# Altium PCB 电机驱动L298N带光耦.PcbDoc (part 1 of 2)
Units mm, origin at the board's own origin, x right, y up, seen from the top; angles counter-clockwise.
Board outline 152.4 x 101.6 mm, 2 copper layers (Top Layer, Bottom Layer); 36 components, 29 nets, 101 pads, 0 vias.
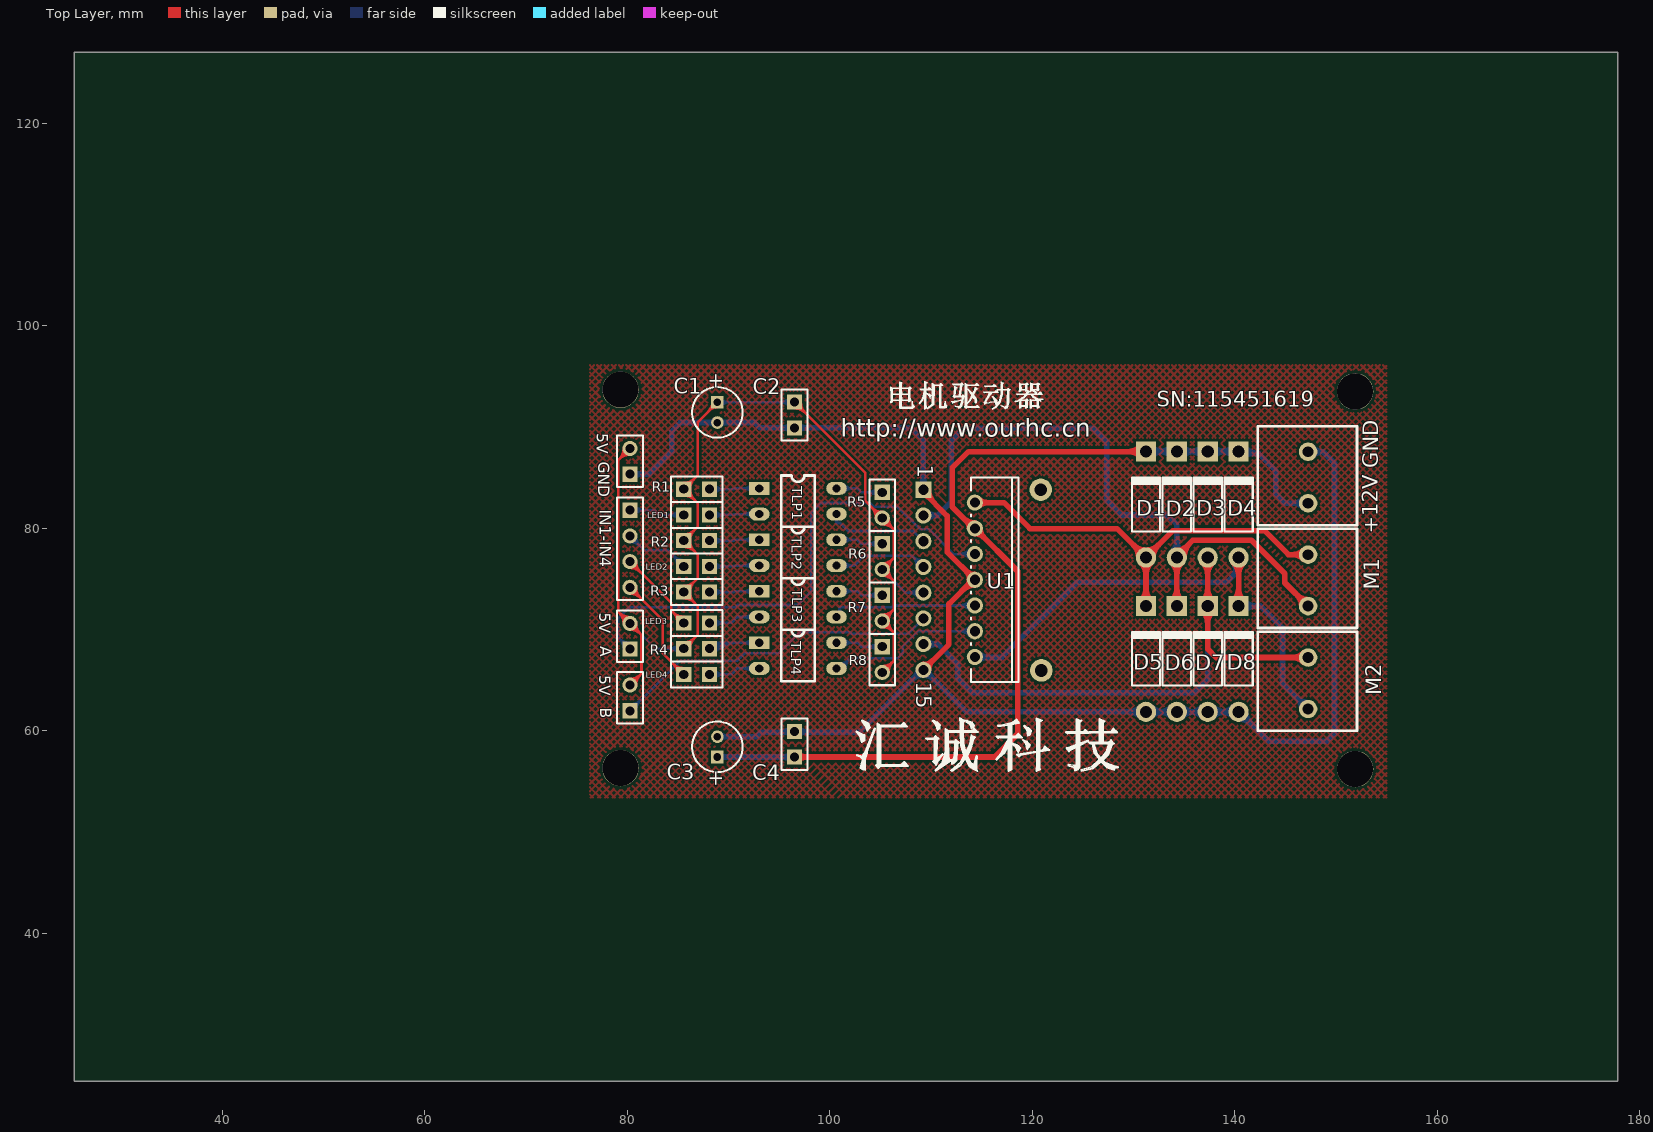
[diagram p0: Top Layer view]
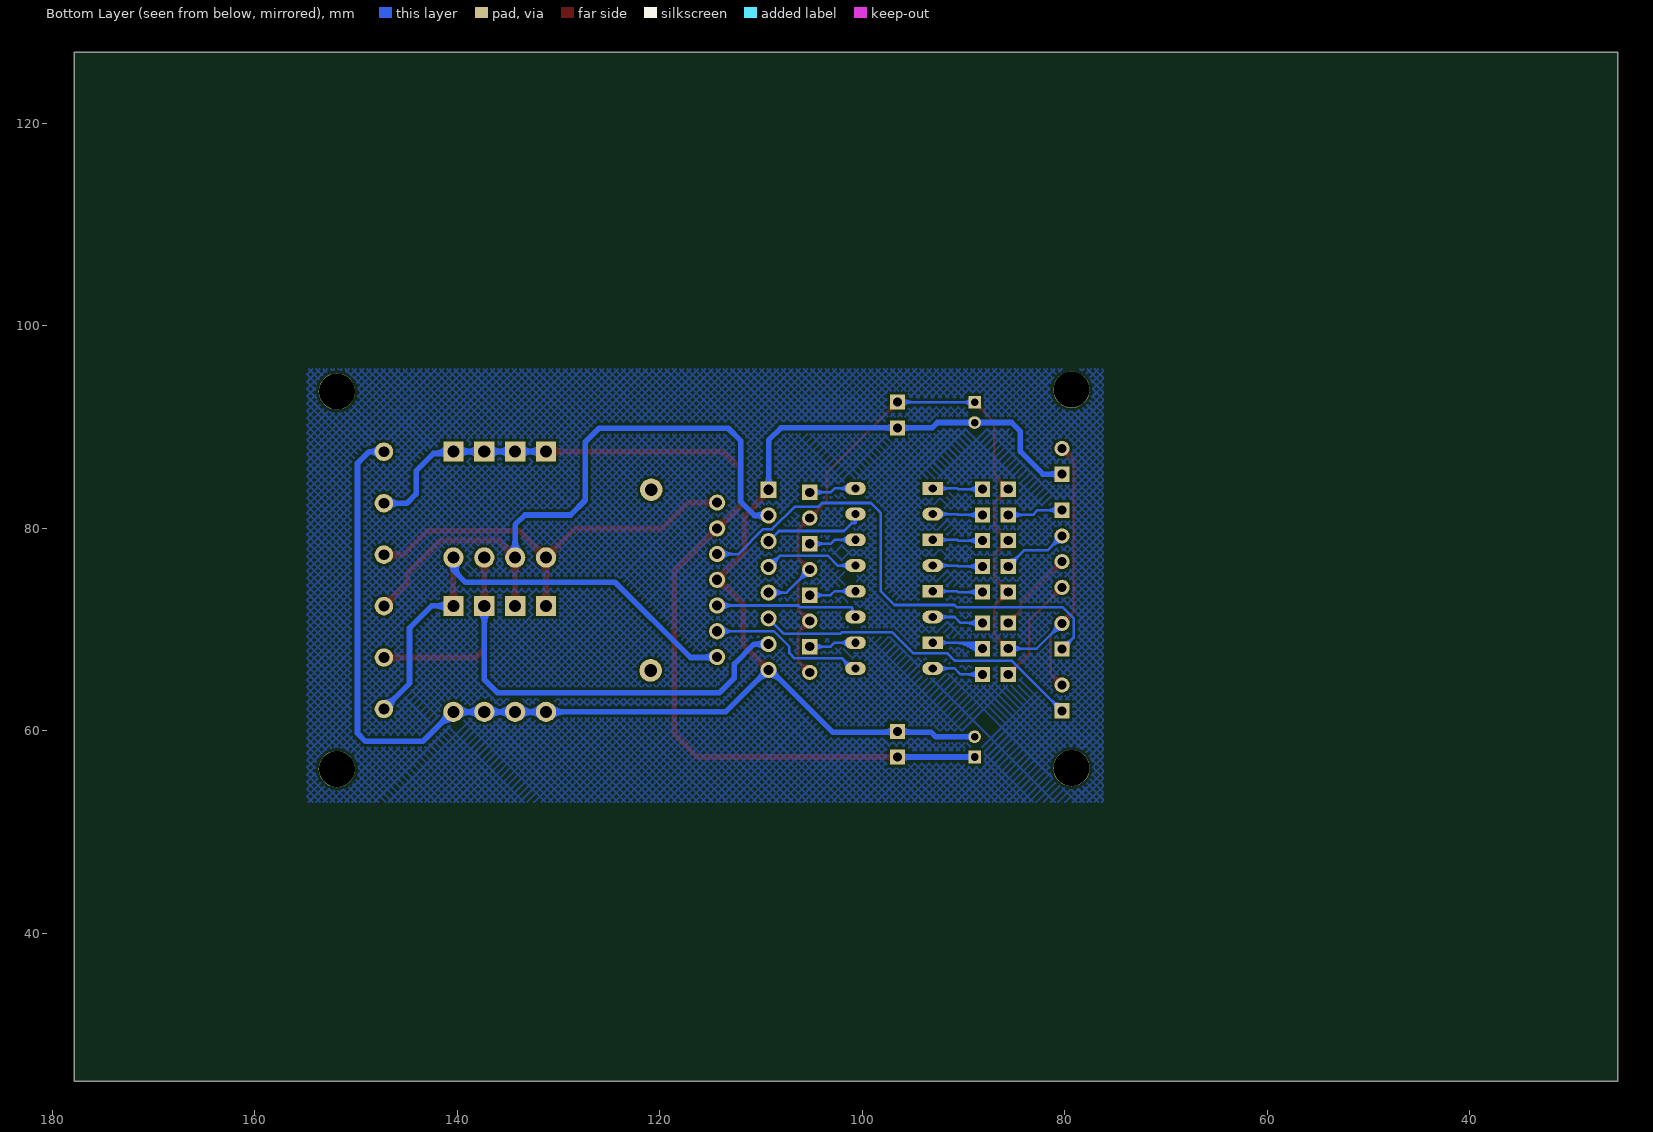
[diagram p1: Bottom Layer view, seen from below]

## Layer stack, top to bottom
Top Layer: signal copper 0.0356
Dielectric: dielectric 0.32, FR-4, Dk 4.8
Bottom Layer: signal copper 0.0356

## Board outline
25.4,25.4 177.8,25.4 177.8,127 25.4,127

## Design rules (kind name [scope] priority, off if disabled: settings)
Clearance [All] p1: gap=0.254
ComponentClearance [All] p1: gap=0.254 collisioncheckmode=3 verticalgap=0.254
PolygonConnect [All] p1: connectstyle=Relief reliefconductorwidth=0.254 reliefentries=4 polygonreliefangle="90 Angle"
RoutingVias [All] p1: holewidth=0.711 width=1.27 viastyle="Through Hole" minholewidth=0.711 minwidth=1.27 maxholewidth=0.711 maxwidth=1.27
SolderMaskExpansion [All] p1: expansion=0.102
TestPointUsage [All] p1: valid=0 allowmultiple=FALSE
Testpoint [All] p1: side=15 testpointundercomponent=TRUE minsize=1.016 maxsize=2.54 preferedsize=1.524 minholesize=0 maxholesize=1.016 preferedholesize=0.813 testpointgrid=0.025 style=1023 order=0-112345678
Width Width_6 [InNet('NetD4_1')] p1: maxlimit=0.554 minlimit=0.554 preferedwidth=0.554
Width Width_5 [InNet('NetD3_1')] p2: maxlimit=0.554 minlimit=0.554 preferedwidth=0.554
Width Width_4 [InNet('NetD2_1')] p3: maxlimit=0.554 minlimit=0.554 preferedwidth=0.554
Width Width_3 [InNet('NetD1_1')] p4: maxlimit=0.554 minlimit=0.554 preferedwidth=0.554
Width Width_2 [InNet('+12V')] p5: maxlimit=0.554 minlimit=0.554 preferedwidth=0.554
Width Width_1 [InNet('GND')] p6: maxlimit=0.554 minlimit=0.554 preferedwidth=0.554
Width [All] p7: maxlimit=0.254 minlimit=0.254 preferedwidth=0.254
17 further rules are at their usual default settings.

## Components (designator, comment, footprint, x,y, rotation, side; value= is the part's Value field where it differs from the comment)
5V "" HDR1X2#1 80.264,61.976 r90 top (schematic designator +5V)
5V "" HDR1X2#1 80.264,85.344 r90 top (schematic designator "Power 5V")
+12V "" PCBComponent_1 146.595,82.983 r270 top (schematic designator "Power 12V")
A "" HDR1X2#1 80.264,68.072 r90 top (schematic designator PWM)
C1 "" CAPPR2-5x6.8 88.9,91.44 r270 top
C2 "104" HDR1X2#2 96.52,89.916 r90 top
C3 "" CAPPR2-5x6.8 88.9,58.42 r90 top
C4 "104" HDR1X2#2 96.52,59.944 r270 top
D1 "1N4007" DIO10.46-5.3x2.8 131.219,82.343 r90 top
D2 "1N4007" DIO10.46-5.3x2.8 134.267,82.343 r90 top
D3 "1N4007" DIO10.46-5.3x2.8 137.315,82.343 r90 top
D4 "1N4007" DIO10.46-5.3x2.8 140.363,82.343 r90 top
D5 "1N4007" DIO10.46-5.3x2.8 131.219,67.103 r90 top
D6 "1N4007" DIO10.46-5.3x2.8 134.267,67.103 r90 top
D7 "1N4007" DIO10.46-5.3x2.8 137.315,67.103 r90 top
D8 "1N4007" DIO10.46-5.3x2.8 140.363,67.103 r90 top
IN1-IN4 "" HDR1X4 80.264,81.788 r270 top
LED1 "" HDR1X2#2 88.123,81.32 r180 top
LED2 "" HDR1X2#2 88.123,76.24 r180 top
LED3 "" HDR1X2#2 88.123,70.652 r180 top
LED4 "" HDR1X2#2 88.123,65.572 r180 top
M1 "" PCBComponent_1 146.595,72.823 r270 top
M2 "" PCBComponent_1 146.595,62.663 r270 top
R1 "" HDR1X2#2 85.583,83.86 r0 top
R2 "" HDR1X2#2 85.583,78.78 r0 top
R3 "" HDR1X2#2 85.583,73.7 r0 top
R4 "" HDR1X2#2 85.583,68.112 r0 top
R5 "" HDR1X2#1 105.177,83.55 r270 top
R6 "" HDR1X2#1 105.177,78.47 r270 top
R7 "" HDR1X2#1 105.177,73.39 r270 top
R8 "" HDR1X2#1 105.177,68.31 r270 top
TLP1 "" DIP4 93.041,83.941 r0 top (schematic designator TLP521-1)
TLP2 "" DIP4 93.041,78.861 r0 top (schematic designator TLP521-2)
TLP3 "" DIP4 93.041,73.781 r0 top (schematic designator TLP521-3)
TLP4 "" DIP4 93.041,68.701 r0 top (schematic designator TLP521-4)
U1 "L298N" DFM-T15/X1.6V 111.781,74.914 r270 top

## Footprints (in the part's own frame and the unit in brackets; to place one, negate y for a bottom-side part, rotate by r counter-clockwise, add the part's x,y. Pads: shape width x height; smd on the part's side, far side on the other; paste and mask are expansions set on the pad)
CAPPR2-5x6.8 [mm] "Capacitor, Electrolytic, Radial; Body 5 x 6.8 mm (Dia.xH typ); Pin Spacing 2 mm (typ)"
  rect 1.25x1.25 hole 0.75: 1(-1,0)
  round 1.25 hole 0.75: 2(1,0)
  silkscreen extent -2.5,-2.5 2.5,2.5
DFM-T15/X1.6V [mm]
  rect 1.6x1.6 hole 1: 1(-8.89,-2.54)
  round 1.6 hole 1: 2(-7.62,2.54) 3(-6.35,-2.54) 4(-5.08,2.54) 5(-3.81,-2.54) 6(-2.54,2.54) 7(-1.27,-2.54) 8(0,2.54) 9(1.27,-2.54) 10(2.54,2.54) 11(3.81,-2.54) 12(5.08,2.54) 13(6.35,-2.54) 14(7.62,2.54) 15(8.89,-2.54)
  silkscreen extent -10.1,2.14 10.1,6.84
DIO10.46-5.3x2.8 [mm] "Diode, Axial; Body 5.2 x 2.7 mm (LxDia. max), Lead Dia. 0.86 mm (max)"
  round 2 hole 1.2: 1(-5.23,0)
  rect 2x2 hole 1.2: 2(5.23,0)
  silkscreen extent -2.65,-1.4 2.75,1.4
DIP4 [mil]
  rect 80x50 hole 32: 1(0,0)
  oval 80x50 hole 32: 2(0,-100) 3(300,-100) 4(300,0)
  silkscreen extent 85,-150 215,50
HDR1X2#1 [mm] "Connector; Header; 2 Position"
  rect 1.5x1.5 hole 0.9: 1(0,0)
  round 1.5 hole 0.9: 2(2.54,0)
  silkscreen extent -1.27,-1.27 3.81,1.27
HDR1X2#2 [mm] "Connector; Header; 2 Position"
  rect 1.5x1.5 hole 0.9: 1(0,0) 2(2.54,0)
  silkscreen extent -1.27,-1.27 3.81,1.27
HDR1X4 [mm] "Connector; Header; 4 Position"
  rect 1.5x1.5 hole 0.9: 1(0,0)
  round 1.5 hole 0.9: 2(2.54,0) 3(5.08,0) 4(7.62,0)
  silkscreen extent -1.27,-1.27 8.89,1.27
PCBComponent_1 [mil]
  round 71.81 hole 41.81: 1(-180,25) 2(20,25)
  silkscreen extent -280,-170 105,215

## Part data
5V 5V +12V A M1 M2: library part MHDR1X2, "Header, 2-Pin"
C1 C3: library part "Cap Pol3", "Polarized Capacitor (Surface Mount)"
C2 C4: library part Cap, "Capacitor"
D1 D2 D3 D4 D5 D6 D7 D8: library part "Diode 1N4007", "1 Amp General Purpose Rectifier"
IN1-IN4: library part MHDR1X4, "Header, 4-Pin"
LED1 LED2 LED3 LED4: library part LED3, "Typical BLUE SiC LED"
R1 R2 R3 R4 R5 R6 R7 R8: library part Res2, "Resistor"
TLP1 TLP2 TLP3 TLP4: library part TLP521-1
U1: "Dual Full Bridge Driver"

## Free pads (board coordinates)
  round 2.224 hole 1.262: 0(120.83,83.809) 0(120.89,65.97)
  round 3.6 hole 3.562: ""(79.336,56.316) ""(79.336,93.685) ""(151.872,56.228) ""(151.872,93.509)

## Nets (pads, with @x,y where several pads share a name; then routed paths per layer and width w, separated by ;. In a path a pad name is that pad's centre, name@x,y a point inside that pad or via, vN(x,y) a via of type N, cw(c..) or ccw(c..) an arc to the next point about the centre after c; other vN are vias at no path point)
+5V: 5V.2 A.2 C1.1 C2.2 R1.1 R2.1 R3.1 R4.1 R5.2 R6.2 R7.2 R8.2 U1.9 | length 484.2
  Top Layer w0.254: 5V.2@80.264,64.516 81.407,65.659 81.407,69.469 A.2@80.264,70.612 79.121,71.755 79.121,86.741 5V.2@80.264,87.884 ; R4.1@85.583,68.112 86.944,69.473 86.944,72.338 R3.1@85.583,73.7 86.944,75.061 86.944,77.418 R2.1@85.583,78.78 86.944,80.141 86.944,82.498 R1.1@85.583,83.86 86.97,85.247 86.97,90.51 C1.1@88.9,92.44 ; C2.2@96.52,92.456 103.505,85.471 103.505,82.681 R5.2@105.177,81.01 106.324,79.862 106.324,77.077 R6.2@105.177,75.93 106.324,74.782 106.324,71.997 R7.2@105.177,70.85 106.324,69.702 106.324,66.917 R8.2@105.177,65.77 ; 79.2,71.676 cw(c78.137,70.612) A.2@79.641,70.612 ; 79.2,71.676 ccw(c80.264,72.739) A.2@80.264,71.235 ; 79.2,71.676 cw(c78.137,70.612) A.2@79.641,70.612 ; 79.2,71.676 ccw(c80.264,72.739) A.2@80.264,71.235 ; 79.2,71.676 cw(c78.137,70.612) A.2@79.641,70.612 ; 79.2,71.676 ccw(c80.264,72.739) A.2@80.264,71.235 ; 79.2,71.676 cw(c78.137,70.612) A.2@79.641,70.612 ; 79.2,71.676 ccw(c80.264,72.739) A.2@80.264,71.235 ; 79.2,86.82 cw(c80.264,85.757) 5V.2@80.264,87.261 ; 79.2,86.82 ccw(c78.137,87.884) 5V.2@79.641,87.884 ; 79.2,86.82 cw(c80.264,85.757) 5V.2@80.264,87.261 ; 79.2,86.82 ccw(c78.137,87.884) 5V.2@79.641,87.884 ; 79.2,86.82 ccw(c78.137,87.884) 5V.2@79.641,87.884 ; 79.2,86.82 cw(c80.264,85.757) 5V.2@80.264,87.261 ; 79.2,86.82 cw(c80.264,85.757) 5V.2@80.264,87.261 ; 79.2,86.82 ccw(c78.137,87.884) 5V.2@79.641,87.884 ; 79.634,71.242 cw(c79.004,70.612) A.2@79.895,70.612 ; 79.634,71.242 ccw(c80.264,71.872) A.2@80.264,70.981 ; 79.634,71.242 cw(c79.004,70.612) A.2@79.895,70.612 ; 79.634,71.242 ccw(c80.264,71.872) A.2@80.264,70.981 ; 79.634,71.242 cw(c79.004,70.612) A.2@79.895,70.612 ; 79.634,71.242 ccw(c80.264,71.872) A.2@80.264,70.981 ; 79.634,71.242 cw(c79.004,70.612) A.2@79.895,70.612 ; 79.634,71.242 ccw(c80.264,71.872) A.2@80.264,70.981 ; 79.634,87.254 cw(c80.264,86.624) 5V.2@80.264,87.515 ; 79.634,87.254 ccw(c79.004,87.884) 5V.2@79.895,87.884 ; 79.634,87.254 cw(c80.264,86.624) 5V.2@80.264,87.515 ; 79.634,87.254 ccw(c79.004,87.884) 5V.2@79.895,87.884 ; 79.634,87.254 cw(c80.264,86.624) 5V.2@80.264,87.515 ; 79.634,87.254 ccw(c79.004,87.884) 5V.2@79.895,87.884 ; 79.634,87.254 cw(c80.264,86.624) 5V.2@80.264,87.515 ; 79.634,87.254 ccw(c79.004,87.884) 5V.2@79.895,87.884 ; 5V.2@80.264,64.885 ccw(c80.264,65.776) 80.894,65.146 ; 5V.2@80.264,64.885 ccw(c80.264,65.776) 80.894,65.146 ; 5V.2@80.264,64.885 ccw(c80.264,65.776) 80.894,65.146 ; 5V.2@80.264,64.885 ccw(c80.264,65.776) 80.894,65.146 ; 5V.2@80.264,65.139 ccw(c80.264,66.643) 81.328,65.58 ; 5V.2@80.264,65.139 ccw(c80.264,66.643) 81.328,65.58 ; 5V.2@80.264,65.139 ccw(c80.264,66.643) 81.328,65.58 ; 5V.2@80.264,65.139 ccw(c80.264,66.643) 81.328,65.58 ; A.2@80.264,69.989 cw(c80.264,68.485) 81.328,69.548 ; A.2@80.264,69.989 cw(c80.264,68.485) 81.328,69.548 ; A.2@80.264,69.989 cw(c80.264,68.485) 81.328,69.548 ; A.2@80.264,69.989 cw(c80.264,68.485) 81.328,69.548 ; A.2@80.264,70.243 cw(c80.264,69.352) 80.894,69.982 ; A.2@80.264,70.243 cw(c80.264,69.352) 80.894,69.982 ; A.2@80.264,70.243 cw(c80.264,69.352) 80.894,69.982 ; A.2@80.264,70.243 cw(c80.264,69.352) 80.894,69.982 ; 5V.2@80.633,64.516 cw(c81.524,64.516) 80.894,65.146 ; 5V.2@80.633,64.516 cw(c81.524,64.516) 80.894,65.146 ; 5V.2@80.633,64.516 cw(c81.524,64.516) 80.894,65.146 ; 5V.2@80.633,64.516 cw(c81.524,64.516) 80.894,65.146 ; A.2@80.633,70.612 ccw(c81.524,70.612) 80.894,69.982 ; A.2@80.633,70.612 ccw(c81.524,70.612) 80.894,69.982 ; A.2@80.633,70.612 ccw(c81.524,70.612) 80.894,69.982 ; A.2@80.633,70.612 ccw(c81.524,70.612) 80.894,69.982 ; 5V.2@80.887,64.516 cw(c82.391,64.516) 81.328,65.58 ; 5V.2@80.887,64.516 cw(c82.391,64.516) 81.328,65.58 ; 5V.2@80.887,64.516 cw(c82.391,64.516) 81.328,65.58 ; 5V.2@80.887,64.516 cw(c82.391,64.516) 81.328,65.58 ; A.2@80.887,70.612 ccw(c82.391,70.612) 81.328,69.548 ; A.2@80.887,70.612 ccw(c82.391,70.612) 81.328,69.548 ; A.2@80.887,70.612 ccw(c82.391,70.612) 81.328,69.548 ; A.2@80.887,70.612 ccw(c82.391,70.612) 81.328,69.548 ; R4.1@85.583,68.481 ccw(c85.583,69.372) R4.1@86.213,68.742 ; R4.1@85.583,68.481 ccw(c85.583,69.372) R4.1@86.213,68.742 ; R4.1@85.583,68.481 ccw(c85.583,69.372) R4.1@86.213,68.742 ; R4.1@85.583,68.481 ccw(c85.583,69.372) R4.1@86.213,68.742 ; R4.1@85.583,68.735 ccw(c85.583,70.239) 86.646,69.175 ; R4.1@85.583,68.735 ccw(c85.583,70.239) 86.646,69.175 ; R4.1@85.583,68.735 ccw(c85.583,70.239) 86.646,69.175 ; R4.1@85.583,68.735 ccw(c85.583,70.239) 86.646,69.175 ; R3.1@85.583,73.077 cw(c85.583,71.573) 86.646,72.636 ; R3.1@85.583,73.077 cw(c85.583,71.573) 86.646,72.636 ; R3.1@85.583,73.077 cw(c85.583,71.573) 86.646,72.636 ; R3.1@85.583,73.077 cw(c85.583,71.573) 86.646,72.636 ; R3.1@85.583,73.331 cw(c85.583,72.44) R3.1@86.213,73.07 ; R3.1@85.583,73.331 cw(c85.583,72.44) R3.1@86.213,73.07 ; R3.1@85.583,73.331 cw(c85.583,72.44) R3.1@86.213,73.07 ; R3.1@85.583,73.331 cw(c85.583,72.44) R3.1@86.213,73.07 ; R3.1@85.583,74.069 ccw(c85.583,74.96) R3.1@86.213,74.33 ; R3.1@85.583,74.069 ccw(c85.583,74.96) R3.1@86.213,74.33 ; R3.1@85.583,74.069 ccw(c85.583,74.96) R3.1@86.213,74.33 ; R3.1@85.583,74.069 ccw(c85.583,74.96) R3.1@86.213,74.33 ; R3.1@85.583,74.323 ccw(c85.583,75.827) 86.646,74.763 ; R3.1@85.583,74.323 ccw(c85.583,75.827) 86.646,74.763 ; R3.1@85.583,74.323 ccw(c85.583,75.827) 86.646,74.763 ; R3.1@85.583,74.323 ccw(c85.583,75.827) 86.646,74.763 ; R2.1@85.583,78.157 cw(c85.583,76.653) 86.646,77.716 ; R2.1@85.583,78.157 cw(c85.583,76.653) 86.646,77.716 ; R2.1@85.583,78.157 cw(c85.583,76.653) 86.646,77.716 ; R2.1@85.583,78.157 cw(c85.583,76.653) 86.646,77.716 ; R2.1@85.583,78.411 cw(c85.583,77.52) R2.1@86.213,78.15 ; R2.1@85.583,78.411 cw(c85.583,77.52) R2.1@86.213,78.15 ; R2.1@85.583,78.411 cw(c85.583,77.52) R2.1@86.213,78.15 ; R2.1@85.583,78.411 cw(c85.583,77.52) R2.1@86.213,78.15 ; R2.1@85.583,79.149 ccw(c85.583,80.04) R2.1@86.213,79.41 ; R2.1@85.583,79.149 ccw(c85.583,80.04) R2.1@86.213,79.41 ; R2.1@85.583,79.149 ccw(c85.583,80.04) R2.1@86.213,79.41 ; R2.1@85.583,79.149 ccw(c85.583,80.04) R2.1@86.213,79.41 ; R2.1@85.583,79.403 ccw(c85.583,80.907) 86.646,79.843 ; R2.1@85.583,79.403 ccw(c85.583,80.907) 86.646,79.843 ; R2.1@85.583,79.403 ccw(c85.583,80.907) 86.646,79.843 ; R2.1@85.583,79.403 ccw(c85.583,80.907) 86.646,79.843 ; R1.1@85.583,83.237 cw(c85.583,81.733) 86.646,82.796 ; R1.1@85.583,83.237 cw(c85.583,81.733) 86.646,82.796 ; R1.1@85.583,83.237 cw(c85.583,81.733) 86.646,82.796 ; R1.1@85.583,83.237 cw(c85.583,81.733) 86.646,82.796 ; R1.1@85.583,83.491 cw(c85.583,82.6) R1.1@86.213,83.23 ; R1.1@85.583,83.491 cw(c85.583,82.6) R1.1@86.213,83.23 ; R1.1@85.583,83.491 cw(c85.583,82.6) R1.1@86.213,83.23 ; R1.1@85.583,83.491 cw(c85.583,82.6) R1.1@86.213,83.23 ; R1.1@85.583,84.229 ccw(c85.583,85.12) R1.1@86.213,84.49 ; R1.1@85.583,84.229 ccw(c85.583,85.12) R1.1@86.213,84.49 ; R1.1@85.583,84.229 ccw(c85.583,85.12) R1.1@86.213,84.49 ; R1.1@85.583,84.229 ccw(c85.583,85.12) R1.1@86.213,84.49 ; R1.1@85.583,84.483 ccw(c85.583,85.987) 86.646,84.923 ; R1.1@85.583,84.483 ccw(c85.583,85.987) 86.646,84.923 ; R1.1@85.583,84.483 ccw(c85.583,85.987) 86.646,84.923 ; R1.1@85.583,84.483 ccw(c85.583,85.987) 86.646,84.923 ; R4.1@85.952,68.112 cw(c86.842,68.112) R4.1@86.213,68.742 ; R4.1@85.952,68.112 cw(c86.842,68.112) R4.1@86.213,68.742 ; R4.1@85.952,68.112 cw(c86.842,68.112) R4.1@86.213,68.742 ; R4.1@85.952,68.112 cw(c86.842,68.112) R4.1@86.213,68.742 ; R3.1@85.952,73.7 cw(c86.842,73.7) R3.1@86.213,74.33 ; R3.1@85.952,73.7 ccw(c86.842,73.7) R3.1@86.213,73.07 ; R3.1@85.952,73.7 cw(c86.842,73.7) R3.1@86.213,74.33 ; R3.1@85.952,73.7 ccw(c86.842,73.7) R3.1@86.213,73.07 ; R3.1@85.952,73.7 ccw(c86.842,73.7) R3.1@86.213,73.07 ; R3.1@85.952,73.7 cw(c86.842,73.7) R3.1@86.213,74.33 ; R3.1@85.952,73.7 cw(c86.842,73.7) R3.1@86.213,74.33 ; R3.1@85.952,73.7 ccw(c86.842,73.7) R3.1@86.213,73.07 ; R2.1@85.952,78.78 cw(c86.842,78.78) R2.1@86.213,79.41 ; R2.1@85.952,78.78 ccw(c86.842,78.78) R2.1@86.213,78.15 ; R2.1@85.952,78.78 cw(c86.842,78.78) R2.1@86.213,79.41 ; R2.1@85.952,78.78 ccw(c86.842,78.78) R2.1@86.213,78.15 ; R2.1@85.952,78.78 ccw(c86.842,78.78) R2.1@86.213,78.15 ; R2.1@85.952,78.78 cw(c86.842,78.78) R2.1@86.213,79.41 ; R2.1@85.952,78.78 cw(c86.842,78.78) R2.1@86.213,79.41 ; R2.1@85.952,78.78 ccw(c86.842,78.78) R2.1@86.213,78.15 ; R1.1@85.952,83.86 ccw(c86.842,83.86) R1.1@86.213,83.23 ; R1.1@85.952,83.86 cw(c86.842,83.86) R1.1@86.213,84.49 ; R1.1@85.952,83.86 ccw(c86.842,83.86) R1.1@86.213,83.23 ; R1.1@85.952,83.86 cw(c86.842,83.86) R1.1@86.213,84.49 ; R1.1@85.952,83.86 ccw(c86.842,83.86) R1.1@86.213,83.23 ; R1.1@85.952,83.86 cw(c86.842,83.86) R1.1@86.213,84.49 ; R1.1@85.952,83.86 ccw(c86.842,83.86) R1.1@86.213,83.23 ; R1.1@85.952,83.86 cw(c86.842,83.86) R1.1@86.213,84.49 ; R4.1@86.206,68.112 cw(c87.71,68.112) 86.646,69.175 ; R4.1@86.206,68.112 cw(c87.71,68.112) 86.646,69.175 ; R4.1@86.206,68.112 cw(c87.71,68.112) 86.646,69.175 ; R4.1@86.206,68.112 cw(c87.71,68.112) 86.646,69.175 ; R3.1@86.206,73.7 cw(c87.71,73.7) 86.646,74.763 ; R3.1@86.206,73.7 ccw(c87.71,73.7) 86.646,72.636 ; R3.1@86.206,73.7 cw(c87.71,73.7) 86.646,74.763 ; R3.1@86.206,73.7 ccw(c87.71,73.7) 86.646,72.636 ; R3.1@86.206,73.7 ccw(c87.71,73.7) 86.646,72.636 ; R3.1@86.206,73.7 cw(c87.71,73.7) 86.646,74.763 ; R3.1@86.206,73.7 cw(c87.71,73.7) 86.646,74.763 ; R3.1@86.206,73.7 ccw(c87.71,73.7) 86.646,72.636 ; R2.1@86.206,78.78 cw(c87.71,78.78) 86.646,79.843 ; R2.1@86.206,78.78 ccw(c87.71,78.78) 86.646,77.716 ; R2.1@86.206,78.78 cw(c87.71,78.78) 86.646,79.843 ; R2.1@86.206,78.78 ccw(c87.71,78.78) 86.646,77.716 ; R2.1@86.206,78.78 ccw(c87.71,78.78) 86.646,77.716 ; R2.1@86.206,78.78 cw(c87.71,78.78) 86.646,79.843 ; R2.1@86.206,78.78 cw(c87.71,78.78) 86.646,79.843 ; R2.1@86.206,78.78 ccw(c87.71,78.78) 86.646,77.716 ; R1.1@86.206,83.86 ccw(c87.71,83.86) 86.646,82.796 ; R1.1@86.206,83.86 cw(c87.71,83.86) 86.646,84.923 ; R1.1@86.206,83.86 ccw(c87.71,83.86) 86.646,82.796 ; R1.1@86.206,83.86 cw(c87.71,83.86) 86.646,84.923 ; R1.1@86.206,83.86 ccw(c87.71,83.86) 86.646,82.796 ; R1.1@86.206,83.86 cw(c87.71,83.86) 86.646,84.923 ; R1.1@86.206,83.86 ccw(c87.71,83.86) 86.646,82.796 ; R1.1@86.206,83.86 cw(c87.71,83.86) 86.646,84.923 ; 88.05,91.59 cw(c88.9,90.74) C1.1@88.9,91.942 ; 88.05,91.59 ccw(c87.2,92.44) C1.1@88.402,92.44 ; 88.05,91.59 cw(c88.9,90.74) C1.1@88.9,91.942 ; 88.05,91.59 ccw(c87.2,92.44) C1.1@88.402,92.44 ; 88.05,91.59 ccw(c87.2,92.44) C1.1@88.402,92.44 ; 88.05,91.59 cw(c88.9,90.74) C1.1@88.9,91.942 ; 88.05,91.59 cw(c88.9,90.74) C1.1@88.9,91.942 ; 88.05,91.59 ccw(c87.2,92.44) C1.1@88.402,92.44 ; C2.2@96.52,91.833 cw(c96.52,90.329) 97.584,91.392 ; C2.2@96.52,91.833 cw(c96.52,90.329) 97.584,91.392 ; C2.2@96.52,91.833 cw(c96.52,90.329) 97.584,91.392 ; C2.2@96.52,91.833 cw(c96.52,90.329) 97.584,91.392 ; C2.2@96.52,92.087 cw(c96.52,91.196) C2.2@97.15,91.826 ; C2.2@96.52,92.087 cw(c96.52,91.196) C2.2@97.15,91.826 ; C2.2@96.52,92.087 cw(c96.52,91.196) C2.2@97.15,91.826 ; C2.2@96.52,92.087 cw(c96.52,91.196) C2.2@97.15,91.826 ; C2.2@96.889,92.456 ccw(c97.78,92.456) C2.2@97.15,91.826 ; C2.2@96.889,92.456 ccw(c97.78,92.456) C2.2@97.15,91.826 ; C2.2@96.889,92.456 ccw(c97.78,92.456) C2.2@97.15,91.826 ; C2.2@96.889,92.456 ccw(c97.78,92.456) C2.2@97.15,91.826 ; C2.2@97.143,92.456 ccw(c98.647,92.456) 97.584,91.392 ; C2.2@97.143,92.456 ccw(c98.647,92.456) 97.584,91.392 ; C2.2@97.143,92.456 ccw(c98.647,92.456) 97.584,91.392 ; C2.2@97.143,92.456 ccw(c98.647,92.456) 97.584,91.392 ; 104.113,82.073 cw(c103.05,81.01) R5.2@104.554,81.01 ; 104.113,82.073 ccw(c105.177,83.137) R5.2@105.177,81.633 ; 104.113,82.073 cw(c103.05,81.01) R5.2@104.554,81.01 ; 104.113,82.073 ccw(c105.177,83.137) R5.2@105.177,81.633 ; 104.113,82.073 cw(c103.05,81.01) R5.2@104.554,81.01 ; 104.113,82.073 ccw(c105.177,83.137) R5.2@105.177,81.633 ; 104.113,82.073 cw(c103.05,81.01) R5.2@104.554,81.01 ; 104.113,82.073 ccw(c105.177,83.137) R5.2@105.177,81.633 ; 104.547,81.64 cw(c103.917,81.01) R5.2@104.808,81.01 ; 104.547,81.64 ccw(c105.177,82.269) R5.2@105.177,81.379 ; 104.547,81.64 cw(c103.917,81.01) R5.2@104.808,81.01 ; 104.547,81.64 ccw(c105.177,82.269) R5.2@105.177,81.379 ; 104.547,81.64 cw(c103.917,81.01) R5.2@104.808,81.01 ; 104.547,81.64 ccw(c105.177,82.269) R5.2@105.177,81.379 ; 104.547,81.64 cw(c103.917,81.01) R5.2@104.808,81.01 ; 104.547,81.64 ccw(c105.177,82.269) R5.2@105.177,81.379 ; R8.2@105.177,66.139 ccw(c105.177,67.029) 105.807,66.4 ; R8.2@105.177,66.139 ccw(c105.177,67.029) 105.807,66.4 ; R8.2@105.177,66.139 ccw(c105.177,67.029) 105.807,66.4 ; R8.2@105.177,66.139 ccw(c105.177,67.029) 105.807,66.4 ; R8.2@105.177,66.393 ccw(c105.177,67.897) 106.24,66.833 ; R8.2@105.177,66.393 ccw(c105.177,67.897) 106.24,66.833 ; R8.2@105.177,66.393 ccw(c105.177,67.897) 106.24,66.833 ; R8.2@105.177,66.393 ccw(c105.177,67.897) 106.24,66.833 ; R7.2@105.177,70.227 cw(c105.177,68.723) 106.24,69.786 ; R7.2@105.177,70.227 cw(c105.177,68.723) 106.24,69.786 ; R7.2@105.177,70.227 cw(c105.177,68.723) 106.24,69.786 ; R7.2@105.177,70.227 cw(c105.177,68.723) 106.24,69.786 ; R7.2@105.177,70.481 cw(c105.177,69.59) 105.807,70.22 ; R7.2@105.177,70.481 cw(c105.177,69.59) 105.807,70.22 ; R7.2@105.177,70.481 cw(c105.177,69.59) 105.807,70.22 ; R7.2@105.177,70.481 cw(c105.177,69.59) 105.807,70.22 ; R7.2@105.177,71.219 ccw(c105.177,72.109) 105.807,71.48 ; R7.2@105.177,71.219 ccw(c105.177,72.109) 105.807,71.48 ; R7.2@105.177,71.219 ccw(c105.177,72.109) 105.807,71.48 ; R7.2@105.177,71.219 ccw(c105.177,72.109) 105.807,71.48 ; R7.2@105.177,71.473 ccw(c105.177,72.977) 106.24,71.913 ; R7.2@105.177,71.473 ccw(c105.177,72.977) 106.24,71.913 ; R7.2@105.177,71.473 ccw(c105.177,72.977) 106.24,71.913 ; R7.2@105.177,71.473 ccw(c105.177,72.977) 106.24,71.913 ; R6.2@105.177,75.307 cw(c105.177,73.803) 106.24,74.866 ; R6.2@105.177,75.307 cw(c105.177,73.803) 106.24,74.866 ; R6.2@105.177,75.307 cw(c105.177,73.803) 106.24,74.866 ; R6.2@105.177,75.307 cw(c105.177,73.803) 106.24,74.866 ; R6.2@105.177,75.561 cw(c105.177,74.67) 105.807,75.3 ; R6.2@105.177,75.561 cw(c105.177,74.67) 105.807,75.3 ; R6.2@105.177,75.561 cw(c105.177,74.67) 105.807,75.3 ; R6.2@105.177,75.561 cw(c105.177,74.67) 105.807,75.3 ; R6.2@105.177,76.299 ccw(c105.177,77.189) 105.807,76.56 ; R6.2@105.177,76.299 ccw(c105.177,77.189) 105.807,76.56 ; R6.2@105.177,76.299 ccw(c105.177,77.189) 105.807,76.56 ; R6.2@105.177,76.299 ccw(c105.177,77.189) 105.807,76.56 ; R6.2@105.177,76.553 ccw(c105.177,78.057) 106.24,76.993 ; R6.2@105.177,76.553 ccw(c105.177,78.057) 106.24,76.993 ; R6.2@105.177,76.553 ccw(c105.177,78.057) 106.24,76.993 ; R6.2@105.177,76.553 ccw(c105.177,78.057) 106.24,76.993 ; R5.2@105.177,80.387 cw(c105.177,78.883) 106.24,79.946 ; R5.2@105.177,80.387 cw(c105.177,78.883) 106.24,79.946 ; R5.2@105.177,80.387 cw(c105.177,78.883) 106.24,79.946 ; R5.2@105.177,80.387 cw(c105.177,78.883) 106.24,79.946 ; R5.2@105.177,80.641 cw(c105.177,79.75) 105.807,80.38 ; R5.2@105.177,80.641 cw(c105.177,79.75) 105.807,80.38 ; R5.2@105.177,80.641 cw(c105.177,79.75) 105.807,80.38 ; R5.2@105.177,80.641 cw(c105.177,79.75) 105.807,80.38 ; R8.2@105.546,65.77 cw(c106.437,65.77) 105.807,66.4 ; R8.2@105.546,65.77 cw(c106.437,65.77) 105.807,66.4 ; R8.2@105.546,65.77 cw(c106.437,65.77) 105.807,66.4 ; R8.2@105.546,65.77 cw(c106.437,65.77) 105.807,66.4 ; R7.2@105.546,70.85 cw(c106.437,70.85) 105.807,71.48 ; R7.2@105.546,70.85 ccw(c106.437,70.85) 105.807,70.22 ; R7.2@105.546,70.85 cw(c106.437,70.85) 105.807,71.48 ; R7.2@105.546,70.85 ccw(c106.437,70.85) 105.807,70.22 ; R7.2@105.546,70.85 ccw(c106.437,70.85) 105.807,70.22 ; R7.2@105.546,70.85 cw(c106.437,70.85) 105.807,71.48 ; R7.2@105.546,70.85 cw(c106.437,70.85) 105.807,71.48 ; R7.2@105.546,70.85 ccw(c106.437,70.85) 105.807,70.22 ; R6.2@105.546,75.93 cw(c106.437,75.93) 105.807,76.56 ; R6.2@105.546,75.93 ccw(c106.437,75.93) 105.807,75.3 ; R6.2@105.546,75.93 cw(c106.437,75.93) 105.807,76.56 ; R6.2@105.546,75.93 ccw(c106.437,75.93) 105.807,75.3 ; R6.2@105.546,75.93 ccw(c106.437,75.93) 105.807,75.3 ; R6.2@105.546,75.93 cw(c106.437,75.93) 105.807,76.56 ; R6.2@105.546,75.93 cw(c106.437,75.93) 105.807,76.56 ; R6.2@105.546,75.93 ccw(c106.437,75.93) 105.807,75.3 ; R5.2@105.546,81.01 ccw(c106.437,81.01) 105.807,80.38 ; R5.2@105.546,81.01 ccw(c106.437,81.01) 105.807,80.38 ; R5.2@105.546,81.01 ccw(c106.437,81.01) 105.807,80.38 ; R5.2@105.546,81.01 ccw(c106.437,81.01) 105.807,80.38 ; R8.2@105.8,65.77 cw(c107.304,65.77) 106.24,66.833 ; R8.2@105.8,65.77 cw(c107.304,65.77) 106.24,66.833 ; R8.2@105.8,65.77 cw(c107.304,65.77) 106.24,66.833 ; R8.2@105.8,65.77 cw(c107.304,65.77) 106.24,66.833 ; R7.2@105.8,70.85 cw(c107.304,70.85) 106.24,71.913 ; R7.2@105.8,70.85 ccw(c107.304,70.85) 106.24,69.786 ; R7.2@105.8,70.85 cw(c107.304,70.85) 106.24,71.913 ; R7.2@105.8,70.85 ccw(c107.304,70.85) 106.24,69.786 ; R7.2@105.8,70.85 ccw(c107.304,70.85) 106.24,69.786 ; R7.2@105.8,70.85 cw(c107.304,70.85) 106.24,71.913 ; R7.2@105.8,70.85 cw(c107.304,70.85) 106.24,71.913 ; R7.2@105.8,70.85 ccw(c107.304,70.85) 106.24,69.786 ; R6.2@105.8,75.93 cw(c107.304,75.93) 106.24,76.993 ; R6.2@105.8,75.93 ccw(c107.304,75.93) 106.24,74.866 ; R6.2@105.8,75.93 cw(c107.304,75.93) 106.24,76.993 ; R6.2@105.8,75.93 ccw(c107.304,75.93) 106.24,74.866 ; R6.2@105.8,75.93 ccw(c107.304,75.93) 106.24,74.866 ; R6.2@105.8,75.93 cw(c107.304,75.93) 106.24,76.993 ; R6.2@105.8,75.93 cw(c107.304,75.93) 106.24,76.993 ; R6.2@105.8,75.93 ccw(c107.304,75.93) 106.24,74.866 ; R5.2@105.8,81.01 ccw(c107.304,81.01) 106.24,79.946 ; R5.2@105.8,81.01 ccw(c107.304,81.01) 106.24,79.946 ; R5.2@105.8,81.01 ccw(c107.304,81.01) 106.24,79.946 ; R5.2@105.8,81.01 ccw(c107.304,81.01) 106.24,79.946
  Bottom Layer w0.254: A.2@80.264,70.612 82.764,68.112 R4.1@85.583,68.112 ; C1.1@88.9,92.44 92.685,92.44 92.701,92.456 C2.2@96.52,92.456 ; R6.2@105.177,75.93 107.463,73.644 U1.9@109.241,73.644 ; A.2@80.264,69.989 cw(c80.264,68.485) 81.328,69.548 ; A.2@80.264,69.989 cw(c80.264,68.485) 81.328,69.548 ; A.2@80.264,69.989 cw(c80.264,68.485) 81.328,69.548 ; A.2@80.264,69.989 cw(c80.264,68.485) 81.328,69.548 ; A.2@80.264,70.243 cw(c80.264,69.352) 80.894,69.982 ; A.2@80.264,70.243 cw(c80.264,69.352) 80.894,69.982 ; A.2@80.264,70.243 cw(c80.264,69.352) 80.894,69.982 ; A.2@80.264,70.243 cw(c80.264,69.352) 80.894,69.982 ; A.2@80.633,70.612 ccw(c81.524,70.612) 80.894,69.982 ; A.2@80.633,70.612 ccw(c81.524,70.612) 80.894,69.982 ; A.2@80.633,70.612 ccw(c81.524,70.612) 80.894,69.982 ; A.2@80.633,70.612 ccw(c81.524,70.612) 80.894,69.982 ; A.2@80.887,70.612 ccw(c82.391,70.612) 81.328,69.548 ; A.2@80.887,70.612 ccw(c82.391,70.612) 81.328,69.548 ; A.2@80.887,70.612 ccw(c82.391,70.612) 81.328,69.548 ; A.2@80.887,70.612 ccw(c82.391,70.612) 81.328,69.548 ; 84.079,68.112 cw(c84.079,66.608) R4.1@85.142,67.671 ; 84.079,68.112 ccw(c84.079,69.616) R4.1@85.142,68.552 ; 84.079,68.112 cw(c84.079,66.608) R4.1@85.142,67.671 ; 84.079,68.112 ccw(c84.079,69.616) R4.1@85.142,68.552 ; 84.079,68.112 cw(c84.079,66.608) R4.1@85.142,67.671 ; 84.079,68.112 ccw(c84.079,69.616) R4.1@85.142,68.552 ; 84.079,68.112 cw(c84.079,66.608) R4.1@85.142,67.671 ; 84.079,68.112 ccw(c84.079,69.616) R4.1@85.142,68.552 ; 84.692,68.112 cw(c84.692,67.221) R4.1@85.322,67.851 ; 84.692,68.112 ccw(c84.692,69.003) R4.1@85.322,68.373 ; 84.692,68.112 cw(c84.692,67.221) R4.1@85.322,67.851 ; 84.692,68.112 ccw(c84.692,69.003) R4.1@85.322,68.373 ; 84.692,68.112 cw(c84.692,67.221) R4.1@85.322,67.851 ; 84.692,68.112 ccw(c84.692,69.003) R4.1@85.322,68.373 ; 84.692,68.112 cw(c84.692,67.221) R4.1@85.322,67.851 ; 84.692,68.112 ccw(c84.692,69.003) R4.1@85.322,68.373 ; C1.1@89.252,92.088 cw(c90.102,91.238) 90.102,92.44 ; C1.1@89.252,92.088 cw(c90.102,91.238) 90.102,92.44 ; C1.1@89.252,92.088 cw(c90.102,91.238) 90.102,92.44 ; C1.1@89.252,92.088 cw(c90.102,91.238) 90.102,92.44 ; C1.1@89.252,92.792 ccw(c90.102,93.642) 90.102,92.44 ; C1.1@89.252,92.792 ccw(c90.102,93.642) 90.102,92.44 ; C1.1@89.252,92.792 ccw(c90.102,93.642) 90.102,92.44 ; C1.1@89.252,92.792 ccw(c90.102,93.642) 90.102,92.44 ; 95.016,92.456 cw(c95.016,90.952) C2.2@96.079,92.015 ; 95.016,92.456 ccw(c95.016,93.96) C2.2@96.079,92.897 ; 95.016,92.456 cw(c95.016,90.952) C2.2@96.079,92.015 ; 95.016,92.456 ccw(c95.016,93.96) C2.2@96.079,92.897 ; 95.016,92.456 cw(c95.016,90.952) C2.2@96.079,92.015 ; 95.016,92.456 ccw(c95.016,93.96) C2.2@96.079,92.897 ; 95.016,92.456 cw(c95.016,90.952) C2.2@96.079,92.015 ; 95.016,92.456 ccw(c95.016,93.96) C2.2@96.079,92.897 ; 95.629,92.456 cw(c95.629,91.565) C2.2@96.259,92.195 ; 95.629,92.456 ccw(c95.629,93.347) C2.2@96.259,92.717 ; 95.629,92.456 cw(c95.629,91.565) C2.2@96.259,92.195 ; 95.629,92.456 ccw(c95.629,93.347) C2.2@96.259,92.717 ; 95.629,92.456 cw(c95.629,91.565) C2.2@96.259,92.195 ; 95.629,92.456 ccw(c95.629,93.347) C2.2@96.259,92.717 ; 95.629,92.456 cw(c95.629,91.565) C2.2@96.259,92.195 ; 95.629,92.456 ccw(c95.629,93.347) C2.2@96.259,92.717 ; R6.2@105.177,75.307 cw(c105.177,73.803) 106.24,74.866 ; R6.2@105.177,75.307 cw(c105.177,73.803) 106.24,74.866 ; R6.2@105.177,75.307 cw(c105.177,73.803) 106.24,74.866 ; R6.2@105.177,75.307 cw(c105.177,73.803) 106.24,74.866 ; R6.2@105.177,75.561 cw(c105.177,74.67) 105.807,75.3 ; R6.2@105.177,75.561 cw(c105.177,74.67) 105.807,75.3 ; R6.2@105.177,75.561 cw(c105.177,74.67) 105.807,75.3 ; R6.2@105.177,75.561 cw(c105.177,74.67) 105.807,75.3 ; R6.2@105.546,75.93 ccw(c106.437,75.93) 105.807,75.3 ; R6.2@105.546,75.93 ccw(c106.437,75.93) 105.807,75.3 ; R6.2@105.546,75.93 ccw(c106.437,75.93) 105.807,75.3 ; R6.2@105.546,75.93 ccw(c106.437,75.93) 105.807,75.3 ; R6.2@105.8,75.93 ccw(c107.304,75.93) 106.24,74.866 ; R6.2@105.8,75.93 ccw(c107.304,75.93) 106.24,74.866 ; R6.2@105.8,75.93 ccw(c107.304,75.93) 106.24,74.866 ; R6.2@105.8,75.93 ccw(c107.304,75.93) 106.24,74.866 ; 107.616,73.644 cw(c107.616,72.019) U1.9@108.765,73.168 ; 107.616,73.644 ccw(c107.616,75.268) U1.9@108.765,74.119 ; 107.616,73.644 cw(c107.616,72.019) U1.9@108.765,73.168 ; 107.616,73.644 ccw(c107.616,75.268) U1.9@108.765,74.119 ; 107.616,73.644 cw(c107.616,72.019) U1.9@108.765,73.168 ; 107.616,73.644 ccw(c107.616,75.268) U1.9@108.765,74.119 ; 107.616,73.644 cw(c107.616,72.019) U1.9@108.765,73.168 ; 107.616,73.644 ccw(c107.616,75.268) U1.9@108.765,74.119 ; 108.229,73.644 cw(c108.229,72.632) U1.9@108.945,73.347 ; 108.229,73.644 ccw(c108.229,74.655) U1.9@108.945,73.94 ; 108.229,73.644 cw(c108.229,72.632) U1.9@108.945,73.347 ; 108.229,73.644 ccw(c108.229,74.655) U1.9@108.945,73.94 ; 108.229,73.644 cw(c108.229,72.632) U1.9@108.945,73.347 ; 108.229,73.644 ccw(c108.229,74.655) U1.9@108.945,73.94 ; 108.229,73.644 cw(c108.229,72.632) U1.9@108.945,73.347 ; 108.229,73.644 ccw(c108.229,74.655) U1.9@108.945,73.94
+12V: +12V.2 C3.1 C4.2 D1.2 D2.2 D3.2 D4.2 U1.4 | length 140.7
  Top Layer w0.554: C4.2@96.504,57.42 116.271,57.42 118.557,59.707 118.557,75.757 U1.4@114.321,79.994 114.213,79.994 112.079,82.128 112.079,85.958 113.693,87.573 D1.2@131.219,87.573 ; D1.2@130.708,87.062 ccw(c129.474,85.827) 129.474,87.573 ccw(c129.474,89.318) D1.2@130.708,88.084 ; 115.214,79.101 cw(c116.106,79.994) 114.844,79.994 ccw(c116.106,79.994) 115.214,79.101 ; 115.214,79.101 ccw(c114.321,78.208) 114.321,79.471 cw(c114.321,78.208) 115.214,79.101 ; C4.2@96.854,57.07 cw(c97.701,56.223) 97.701,57.42 ccw(c97.701,56.223) C4.2@96.854,57.07 ; C4.2@96.854,57.738 ccw(c97.623,58.507) 97.623,57.42 cw(c97.623,58.507) C4.2@96.854,57.738 ; 113.244,80.962 ccw(c114.321,82.039) 114.321,80.517 cw(c114.321,82.039) 113.244,80.962 ; 113.504,80.703 cw(c112.795,79.994) 113.798,79.994 ccw(c112.795,79.994) 113.504,80.703
  Bottom Layer w0.554: C3.1@88.9,57.42 C4.2@96.504,57.42 ; D1.2@131.219,87.573 D4.2@140.363,87.573 140.55,87.386 142.339,87.386 ; D1.2@131.73,87.062 cw(c132.964,85.827) 132.964,87.573 cw(c132.964,89.318) D1.2@131.73,88.084 ; D2.2@133.756,87.062 ccw(c132.522,85.827) 132.522,87.573 ccw(c132.522,89.318) D2.2@133.756,88.084 ; D2.2@134.778,87.062 cw(c136.012,85.827) 136.012,87.573 cw(c136.012,89.318) D2.2@134.778,88.084 ; D3.2@136.804,87.062 ccw(c135.57,85.827) 135.57,87.573 ccw(c135.57,89.318) D3.2@136.804,88.084 ; D3.2@137.826,87.062 cw(c139.06,85.827) 139.06,87.573 cw(c139.06,89.318) D3.2@137.826,88.084 ; D4.2@139.852,87.062 ccw(c138.618,85.827) 138.618,87.573 ccw(c138.618,89.318) D4.2@139.852,88.084 ; D4.2@140.874,87.062 cw(c141.657,86.279) 141.657,87.386 ; D4.2@140.912,88.043 ccw(c142.339,89.264) 142.339,87.386 ; +12V.2@146.781,82.026 ccw(c145.697,80.942) 145.697,82.475 ccw(c145.697,84.009) +12V.2@146.781,82.924 ; +12V.2@147.23,82.475 144.967,82.475 144.052,83.39 144.052,85.673 142.339,87.386 ; 89.74,57.42 cw(c89.74,58.26) 89.146,57.666 ccw(c89.74,58.26) 89.74,57.42 ; 89.74,57.42 ccw(c89.74,56.58) 89.146,57.174 cw(c89.74,56.58) 89.74,57.42 ; 95.339,57.42 cw(c95.339,56.223) 96.186,57.07 ccw(c95.339,56.223) 95.339,57.42 ; 95.417,57.42 ccw(c95.417,58.507) 96.186,57.738 cw(c95.417,58.507) 95.417,57.42
GND: 5V.1@80.264,85.344 +12V.1 C1.2 C2.1 C3.2 C4.1 D5.1 D6.1 D7.1 D8.1 U1.1 U1.8 U1.15 | length 212.3
  Top Layer w0.554: U1.15@109.241,66.024 111.76,68.543 111.76,72.52 114.154,74.914 U1.8@114.321,74.914 111.589,77.645 111.589,81.226 109.241,83.574 U1.1@109.241,83.804 ; U1.15@109.241,66.547 ccw(c109.241,67.809) 110.134,66.916 ccw(c111.026,66.024) U1.15@109.764,66.024 ; U1.1@109.241,83.281 cw(c109.241,82.572) U1.1@109.742,83.073 ; U1.1@109.764,83.804 ccw(c111.581,83.804) 110.296,82.519 ; 113.143,73.903 cw(c114.321,72.726) U1.8@114.321,74.391 ; 113.546,74.305 ccw(c112.937,74.914) 113.798,74.914 ccw(c112.535,74.914) 113.428,75.806 ccw(c114.321,76.699) U1.8@114.321,75.437
  Bottom Layer w0.554: 5V.1@80.264,85.344 82.154,85.344 84.386,87.576 84.386,89.574 85.252,90.44 92.574,90.44 93.098,89.916 108.028,89.916 109.241,88.703 U1.1@109.241,83.804 ; 5V.1@80.598,85.01 cw(c81.406,84.202) 81.406,85.344 cw(c81.406,86.486) 5V.1@80.598,85.678 ; C1.2@88.654,90.194 ccw(c88.06,89.6) 88.06,90.44 ccw(c88.06,91.28) C1.2@88.654,90.686 ; C3.2@88.9,59.42 92.755,59.42 93.213,59.878 102.917,59.878 U1.15@109.063,66.024 ; C1.2@89.146,90.194 cw(c89.74,89.6) 89.74,90.44 cw(c89.74,91.28) C1.2@89.146,90.686 ; C2.1@96.186,89.582 ccw(c95.378,88.774) 95.378,89.916 ccw(c95.378,91.058) C2.1@96.186,90.25 ; C2.1@96.854,89.582 cw(c97.662,88.774) 97.662,89.916 cw(c97.662,91.058) C2.1@96.854,90.25 ; 108.044,65.005 cw(c109.241,63.808) 109.241,65.501 cw(c109.241,63.997) 110.304,65.06 ; 108.474,65.435 ccw(c107.885,66.024) U1.15@108.718,66.024 ; U1.1@108.871,84.173 ccw(c107.978,85.066) 109.241,85.066 ccw(c110.503,85.066) U1.1@109.611,84.173 ; U1.15@109.34,66.024 113.491,61.873 140.479,61.873 143.388,58.965 149.039,58.965 149.838,59.764 149.838,86.421 148.703,87.555 ; U1.15@109.764,66.024 ccw(c110.786,66.024) 110.063,65.301 ; D5.1@130.708,61.362 ccw(c129.474,60.127) 129.474,61.873 ccw(c129.474,63.618) D5.1@130.708,62.384 ; D5.1@131.73,61.362 cw(c132.964,60.127) 132.964,61.873 cw(c132.964,63.618) D5.1@131.73,62.384 ; D6.1@133.756,61.362 ccw(c132.522,60.127) 132.522,61.873 ccw(c132.522,63.618) D6.1@133.756,62.384 ; D6.1@134.778,61.362 cw(c136.012,60.127) 136.012,61.873 cw(c136.012,63.618) D6.1@134.778,62.384 ; D7.1@136.804,61.362 ccw(c135.57,60.127) 135.57,61.873 ccw(c135.57,63.618) D7.1@136.804,62.384 ; D7.1@137.826,61.362 cw(c139.06,60.127) 139.06,61.873 cw(c139.06,63.618) D7.1@137.826,62.384 ; D8.1@139.852,61.362 ccw(c138.618,60.127) 138.618,61.873 ccw(c138.618,63.618) D8.1@139.852,62.384 ; D8.1@140.363,61.15 cw(c140.363,59.123) 141.796,60.556 ; D8.1@141.086,61.873 ccw(c142.55,61.873) 141.515,60.837 ; +12V.1@147.23,87.555 148.703,87.555 ; +12V.1@147.692,87.12 cw(c148.703,86.165) 148.703,87.555 ; +12V.1@147.692,87.991 ccw(c148.703,88.946) 148.703,87.555 ; 89.74,59.42 cw(c89.74,60.26) 89.146,59.666 ccw(c89.74,60.26) 89.74,59.42 ; 89.74,59.42 ccw(c89.74,58.58) 89.146,59.174 cw(c89.74,58.58) 89.74,59.42 ; 95.219,59.878 ccw(c95.219,61.245) 96.186,60.278 cw(c95.219,61.245) 95.219,59.878 ; 95.537,59.878 cw(c95.537,58.961) 96.186,59.61 ccw(c95.537,58.961) 95.537,59.878 ; C4.1@96.854,59.61 cw(c97.503,58.961) 97.503,59.878 ccw(c97.503,58.961) C4.1@96.854,59.61 ; C4.1@96.854,60.278 ccw(c97.821,61.245) 97.821,59.878 cw(c97.821,61.245) C4.1@96.854,60.278
Net+5V_1: 5V.1@80.264,61.976 U1.11 | length 47.9
  Bottom Layer w0.254: 5V.1@80.264,61.976 85.192,66.904 90.856,66.904 91.618,67.666 94.971,67.666 97.028,69.723 102.006,69.723 102.159,69.571 107.708,69.571 U1.11@109.241,71.104 ; 5V.1@80.264,62.345 ccw(c80.264,63.236) 5V.1@80.894,62.606 ; 5V.1@80.264,62.345 ccw(c80.264,63.236) 5V.1@80.894,62.606 ; 5V.1@80.264,62.345 ccw(c80.264,63.236) 5V.1@80.894,62.606 ; 5V.1@80.264,62.345 ccw(c80.264,63.236) 5V.1@80.894,62.606 ; 5V.1@80.264,62.599 ccw(c80.264,64.103) 81.328,63.04 ; 5V.1@80.264,62.599 ccw(c80.264,64.103) 81.328,63.04 ; 5V.1@80.264,62.599 ccw(c80.264,64.103) 81.328,63.04 ; 5V.1@80.264,62.599 ccw(c80.264,64.103) 81.328,63.04 ; 5V.1@80.633,61.976 cw(c81.524,61.976) 5V.1@80.894,62.606 ; 5V.1@80.633,61.976 cw(c81.524,61.976) 5V.1@80.894,62.606 ; 5V.1@80.633,61.976 cw(c81.524,61.976) 5V.1@80.894,62.606 ; 5V.1@80.633,61.976 cw(c81.524,61.976) 5V.1@80.894,62.606 ; 5V.1@80.887,61.976 cw(c82.391,61.976) 81.328,63.04 ; 5V.1@80.887,61.976 cw(c82.391,61.976) 81.328,63.04 ; 5V.1@80.887,61.976 cw(c82.391,61.976) 81.328,63.04 ; 5V.1@80.887,61.976 cw(c82.391,61.976) 81.328,63.04
NetD1_1: D1.1 D5.2 M1.1 U1.2 | length 57.5
  Top Layer w0.554: U1.2@114.321,82.534 117.203,82.534 119.765,79.972 128.36,79.972 D1.1@131.219,77.113 ; U1.2@114.691,82.164 cw(c115.583,81.271) 115.583,82.534 cw(c115.583,83.796) U1.2@114.691,82.903 ; D1.1@130.496,77.113 ccw(c128.751,77.113) 129.985,78.347 ccw(c131.219,79.581) 131.219,77.836 ccw(c131.219,79.581) 132.453,78.347 ccw(c133.687,77.113) D1.1@131.942,77.113 ; D5.2@130.708,72.844 ccw(c129.474,74.078) 131.219,74.078 ccw(c132.964,74.078) D5.2@131.73,72.844 ; D1.1@130.708,76.602 cw(c129.474,75.367) 131.219,75.367 cw(c132.964,75.367) D1.1@131.73,76.602 ; D1.1@131.134,77.113 D1.1@131.219,77.113 ; D5.2@131.219,72.333 D1.1@131.219,77.113 ; M1.1@146.781,76.946 ccw(c145.697,75.862) 145.697,77.395 ccw(c145.697,78.929) M1.1@146.781,77.844 ; M1.1@147.23,77.395 145.287,77.395 142.909,79.774 133.88,79.774 D1.1@131.219,77.113
NetD2_1: D2.1 D6.2 M1.2 U1.3 | length 79.9
  Top Layer w0.554: D6.2@133.756,72.844 ccw(c132.522,74.078) 134.267,74.078 ccw(c136.012,74.078) D6.2@134.778,72.844 ; D2.1@133.756,76.602 cw(c132.522,75.367) 134.267,75.367 cw(c136.012,75.367) D2.1@134.778,76.602 ; D2.1@134.083,77.231 134.255,77.231 135.853,78.829 141.618,78.829 144.929,75.518 144.929,74.617 M1.2@147.23,72.315 ; D6.2@134.267,72.333 D2.1@134.267,77.113 ; D2.1@134.267,77.836 ccw(c134.267,79.267) 135.279,78.255 ; D2.1@134.99,77.113 cw(c137.05,77.113) 135.593,78.569 ; M1.2@146.595,72.315 ccw(c145.062,72.315) 146.146,73.399 ccw(c147.23,74.484) M1.2@147.23,72.95
  Bottom Layer w0.554: U1.3@109.241,81.264 110.632,81.264 111.983,82.614 111.983,88.631 113.228,89.877 125.993,89.877 127.343,88.528 127.343,82.768 128.796,81.315 133.31,81.315 134.267,80.358 D2.1@134.267,77.113 ; U1.3@109.611,80.894 cw(c110.503,80.001) 110.503,81.264 cw(c110.503,82.526) U1.3@109.611,81.633 ; D2.1@133.756,77.624 ccw(c132.522,78.858) 134.267,78.858 ccw(c136.012,78.858) D2.1@134.778,77.624
NetD3_1: D3.1 D7.2 M2.1 U1.13 | length 73
  Top Layer w0.554: D7.2@136.804,71.822 cw(c135.57,70.587) 137.315,70.587 cw(c139.06,70.587) D7.2@137.826,71.822 ; D7.2@136.804,72.844 ccw(c135.57,74.078) 137.315,74.078 ccw(c139.06,74.078) D7.2@137.826,72.844 ; D3.1@136.804,76.602 cw(c135.57,75.367) 137.315,75.367 cw(c139.06,75.367) D3.1@137.826,76.602 ; D7.2@137.315,72.333 137.315,68.063 138.142,67.235 M2.1@147.23,67.235 ; D7.2@137.315,72.642 D3.1@137.315,77.113 ; M2.1@146.781,66.786 ccw(c145.697,65.702) 145.697,67.235 ccw(c145.697,68.769) M2.1@146.781,67.684
  Bottom Layer w0.554: U1.13@109.241,68.564 110.671,68.564 112.621,66.614 112.621,65.244 114.105,63.76 136.024,63.76 137.315,65.05 D7.2@137.315,72.333 ; U1.13@109.611,68.194 cw(c110.503,67.301) 110.503,68.564 cw(c110.503,69.826) U1.13@109.611,68.933 ; D7.2@136.804,71.822 cw(c135.57,70.587) 137.315,70.587 cw(c139.06,70.587) D7.2@137.826,71.822